# EAGLE board CT_schematic (EAGLE 7.6.0)

Size 100 x 80 mm. Coordinates in mm from the lower left corner, seen from the top.
Outline: 0,0 100,0 100,80 0,80 0,0
Copper layers (1*16): Top 0.035mm / dielectric 1.5mm / Bottom 0.035mm
Design rules "default": minimum track width 10mil, minimum drill 24mil, track to track 8mil, track to pad 8mil, pad to pad 8mil, via to via 8mil, smd to smd 8mil, copper to edge 40mil, drill to drill 8mil, minimum pad ring 10mil, minimum via ring 8mil, stop-mask expansion 4mil, vias tented up to drill 0mil, thermal gap 10mil

## Footprints (pad centres in the part's own frame; a part is rotated, then mirrored left to right if it is on the bottom)
C0603 = smd 0.8 x 0.8: 1 -0.762,0; 2 0.762,0
C0402 = smd 0.5 x 0.5: 1 -0.508,0; 2 0.508,0
C0805 = smd 1.2 x 1.3: 1 -1.016,0; 2 1.016,0
C1210 = smd 1.2 x 2.5: 1 -1.524,0; 2 1.524,0
EXV-9B = smd 2.718 x 1.778: 1 -2.108,0; 2 2.108,0
C1206 = smd 1.3 x 1.6: 1 -1.524,0; 2 1.524,0
R0603 = smd 0.8 x 0.8: 1 -0.762,0; 2 0.762,0
WLCSP64 = smd 0.34 x 0.34: A1 -1.75,1.75; A2 -1.25,1.75; A3 -0.75,1.75; A4 -0.25,1.75; A5 0.25,1.75; A6 0.75,1.75; A7 1.25,1.75; A8 1.75,1.75; B1 -1.75,1.25; B2 -1.25,1.25; B3 -0.75,1.25; B4 -0.25,1.25; B5 0.25,1.25; B6 0.75,1.25; B7 1.25,1.25; B8 1.75,1.25; C1 -1.75,0.75; C2 -1.25,0.75; C3 -0.75,0.75; C4 -0.25,0.75; C5 0.25,0.75; C6 0.75,0.75; C7 1.25,0.75; C8 1.75,0.75; D1 -1.75,0.25; D2 -1.25,0.25; D3 -0.75,0.25; D4 -0.25,0.25; D5 0.25,0.25; D6 0.75,0.25; D7 1.25,0.25; D8 1.75,0.25; E1 -1.75,-0.25; E2 -1.25,-0.25; E3 -0.75,-0.25; E4 -0.25,-0.25; E5 0.25,-0.25; E6 0.75,-0.25; E7 1.25,-0.25; E8 1.75,-0.25; F1 -1.75,-0.75; F2 -1.25,-0.75; F3 -0.75,-0.75; F4 -0.25,-0.75; F5 0.25,-0.75; F6 0.75,-0.75; F7 1.25,-0.75; F8 1.75,-0.75; G1 -1.75,-1.25; G2 -1.25,-1.25; G3 -0.75,-1.25; G4 -0.25,-1.25; G5 0.25,-1.25; G6 0.75,-1.25; G7 1.25,-1.25; G8 1.75,-1.25; H1 -1.75,-1.75; H2 -1.25,-1.75; H3 -0.75,-1.75; H4 -0.25,-1.75; H5 0.25,-1.75; H6 0.75,-1.75; H7 1.25,-1.75; H8 1.75,-1.75
10100565 = smd 0.8 x 2.35: 1 0,0; 2 1.25,0; 3 2.55,0; 4 4.25,0; 5 5.43,0; 6 6.68,0; 7 7.93,0; 8 9.18,0; 9 11.67,0; 10 14.18,0; 11 15.43,0; 12 16.68,0; 13 17.93,0; 14 19.18,0; 15 21.68,0 | smd 1.5 x 3.1: 16 23.495,-1.375; 20 25.685,-22.875 | smd 1.55 x 3.1: 17 -1.815,-1.375; 21 -1.815,-22.875 | drill 1.1 pad 1.1: 18 21.68,-2.375; 19 0.68,-2.375
TST-110-05-T-D-RA = drill 1 pad 1.7 square: 1 0,0 | drill 1 pad 1.7: 2 0,2.54; 3 2.54,0; 4 2.54,2.54; 5 5.08,0; 6 5.08,2.54; 7 7.62,0; 8 7.62,2.54; 9 10.16,0; 10 10.16,2.54; 11 12.7,0; 12 12.7,2.54; 13 15.24,0; 14 15.24,2.54; 15 17.78,0; 16 17.78,2.54; 17 20.32,0; 18 20.32,2.54; 19 22.86,0; 20 22.86,2.54
WNG008 = smd 0.45 x 0.55: 1 -1.27,0; 2 0,0; 3 1.27,0; 4 2.54,0; 5 2.54,7.5; 6 1.27,7.5; 7 0,7.5; 8 -1.27,7.53 | smd 4.9 x 4.75: PAD 0.635,3.75
WFDN-8 = smd 0.48 x 0.7: 1 0,0; 2 1.27,0; 3 2.54,0; 4 3.81,0; 5 3.81,4.45; 6 2.54,4.45; 7 1.27,4.45; 8 0,4.45 | smd 4 x 3: 9 1.89,2.25
FCI_10118193-0001LF = smd 0.4 x 1.35: 1 -1.3,2.675; 2 -0.65,2.675; 3 0,2.675; 4 0.65,2.675; 5 1.3,2.675 | smd 1.6 x 1.4: 6 -3.2,2.45; 7 3.2,2.45 | smd 1.9 x 1.9: 8 -1.2,0; 9 1.2,0 | hole 0.5: -3.3,0; 3.3,0
SOT143B = smd 1 x 0.7: 1 -0.75,-1 | smd 0.6 x 0.7: 2 0.95,-1; 3 0.95,1; 4 -0.95,1
QFN-28 = smd 0.813 x 0.305: 1 -2.451,1.5; 2 -2.451,1; 3 -2.451,0.5; 4 -2.451,0; 5 -2.451,-0.5; 6 -2.451,-1; 7 -2.451,-1.5; 15 2.451,-1.5; 16 2.451,-1; 17 2.451,-0.5; 18 2.451,0; 19 2.451,0.5; 20 2.451,1; 21 2.451,1.5 | smd 0.305 x 0.813: 8 -1.5,-2.451; 9 -1,-2.451; 10 -0.5,-2.451; 11 0,-2.451; 12 0.5,-2.451; 13 1,-2.451; 14 1.5,-2.451; 22 1.5,2.451; 23 1,2.451; 24 0.5,2.451; 25 0,2.451; 26 -0.5,2.451; 27 -1,2.451; 28 -1.5,2.451 | smd 3.607 x 3.607: 29 0,0
SJ-43515TS-SMT-TR = smd 2.2 x 3: 1 0.6,-7.4; 4 3.4,-7.4 | smd 3 x 3: 2 12.8,-7.4; 5 17,-3 | smd 2 x 3: 3 5.3,0; 6 2.5,0 | drill 1.8: P$7 4.5,-3.69; P$8 11.54,-3.69
ABS07-32.768KHZ-7-T = smd 1.1 x 2.4: 1 -2.5,0; 2 0,0
ASFL1 = smd 1.7 x 1.5: 1 -1.27,-1.1; 2 1.27,-1.1; 3 1.27,1.1; 4 -1.27,1.1
LP2954 = smd 1.6 x 0.6: 1 -2.475,1.905 | smd 1.55 x 0.6: 2 -2.475,0.635; 3 -2.475,-0.635; 4 -2.475,-1.905; 5 2.475,-1.905; 6 2.475,-0.635; 7 2.475,0.635; 8 2.475,1.905
SOIC-8_EP = smd 1.6 x 0.533: 1 -2.921,1.905; 2 -2.921,0.635; 3 -2.921,-0.635; 4 -2.921,-1.905; 5 2.921,-1.905; 6 2.921,-0.635; 7 2.921,0.635; 8 2.921,1.905 | smd 2.54 x 3.302: EPAD 0,0 | drill 0.406 pad 0.406: P$1 -0.508,0.635; P$2 0.381,0.635; P$3 -0.508,-0.635; P$4 0.381,-0.635
DFN8_2X3MC = smd 0.813 x 0.305: 1 -1.398,0.75; 2 -1.398,0.25; 3 -1.398,-0.25; 4 -1.398,-0.75; 5 1.398,-0.75; 6 1.398,-0.25; 7 1.398,0.25; 8 1.398,0.75 | smd 1.753 x 1.549: 9 0,0
JST-2-SMD = smd 1 x 4.6: 1 -1,-3.7; 2 1,-3.7 | smd 1.6 x 3.4: NC1 -3.4,1.5; NC2 3.4,1.5
SON-6 = smd 0.55 x 0.3: 1 -0.355,0.5 | smd 0.52 x 0.3: 2 -0.37,0; 3 -0.37,-0.5; 4 0.37,-0.5; 5 0.37,0; 6 0.37,0.5
SW_4-1437565-2 = smd 1.4 x 2.1: 1 -2.23,4.55; 2 -2.23,-4.55; 3 2.23,4.55; 4 2.23,-4.55
LGM67K-G1J2-24-Z = smd 0.8 x 1.4: A -2,0; C 0,0
NC7SZ125M5X = smd 1.3 x 0.7: 1 -1.3,0.95; 2 -1.3,0; 3 -1.3,-0.95; 4 1.3,-0.95; 5 1.3,0.95
DUMMY_PACKAGE_231 = drill 0.3: 1 0,-1; 2 1.5,-1; 3 3,-1

## Placement (x,y rotation side)
C1  1e-06  [C0603]  -22.86,97.79 0 top  (outside the outline)
C2  1e-07  [C0603]  -26.67,97.79 0 top  (outside the outline)
C3  1e-07  [C0603]  -30.48,97.79 0 top  (outside the outline)
C4  1e-07  [C0603]  -34.29,97.79 0 top  (outside the outline)
C5  1e-07  [C0603]  -38.1,97.79 0 top  (outside the outline)
C6  1e-07  [C0603]  -41.91,97.79 0 top  (outside the outline)
C7  4.7e-06  [C0603]  -19.05,97.79 0 top  (outside the outline)
C8  1e-08  [C0603]  -45.72,97.79 0 top  (outside the outline)
C9  1e-06  [C0603]  -49.53,97.79 0 top  (outside the outline)
C10  1e-07  [C0603]  -53.34,97.79 0 top  (outside the outline)
C11  1e-11  [C0402]  -76.2,97.79 0 top  (outside the outline)
C12  1e-11  [C0402]  -80.01,97.79 0 top  (outside the outline)
C13  1e-07  [C0402]  -83.82,97.79 0 top  (outside the outline)
C14  1e-05  [C0805]  -45.72,82.55 0 top  (outside the outline)
C15  1e-07  [C0402]  -87.63,97.79 0 top  (outside the outline)
C16  1e-08  [C0402]  -15.24,102.87 0 top  (outside the outline)
C17  1e-07  [C0402]  -19.05,102.87 0 top  (outside the outline)
C18  2.2e-05  [C1210]  -38.1,74.93 0 top  (outside the outline)
C19  2.2e-05  [C1210]  -44.45,74.93 0 top  (outside the outline)
C20  1e-09  [C0402]  -22.86,102.87 0 top  (outside the outline)
C21  1e-09  [C0402]  -26.67,102.87 0 top  (outside the outline)
C22  1e-07  [C0402]  -30.48,102.87 0 top  (outside the outline)
C23  1e-07  [C0402]  -34.29,102.87 0 top  (outside the outline)
C24  1e-07  [C0402]  -38.1,102.87 0 top  (outside the outline)
C25  1e-07  [C0402]  -41.91,102.87 0 top  (outside the outline)
C26  1e-07  [C0402]  -45.72,102.87 0 top  (outside the outline)
C27  1e-05  [C0805]  -50.8,82.55 0 top  (outside the outline)
C28  1e-05  [C0805]  -55.88,82.55 0 top  (outside the outline)
C29  1e-05  [C0805]  -60.96,82.55 0 top  (outside the outline)
C30  1e-05  [C0805]  -66.04,82.55 0 top  (outside the outline)
C31  1e-05  [C0805]  -71.12,82.55 0 top  (outside the outline)
C32  1e-08  [C0402]  -49.53,102.87 0 top  (outside the outline)
C33  1e-08  [C0402]  -53.34,102.87 0 top  (outside the outline)
C34  1e-06  [EXV-9B]  -16.51,82.55 0 top  (outside the outline)
C35  2.2e-06  [EXV-9B]  -25.4,82.55 0 top  (outside the outline)
C36  1e-05  [C1210]  -50.8,74.93 0 top  (outside the outline)
C37  1e-05  [C1210]  -57.15,74.93 0 top  (outside the outline)
C38  1e-05  [C1210]  -63.5,74.93 0 top  (outside the outline)
C39  1e-05  [C1210]  -69.85,74.93 0 top  (outside the outline)
C40  1e-07  [C0402]  -57.15,102.87 0 top  (outside the outline)
C41  1e-05  [C1206]  -76.2,74.93 0 top  (outside the outline)
C42  1e-05  [C1206]  -82.55,74.93 0 top  (outside the outline)
C43  1e-08  [C0402]  -60.96,102.87 0 top  (outside the outline)
C44  1e-08  [C0402]  -64.77,102.87 0 top  (outside the outline)
R2  1000.0  [R0603]  -57.15,97.79 0 top  (outside the outline)
R4  4700.0  [R0603]  -60.96,97.79 0 top  (outside the outline)
R5  10000.0  [R0603]  -30.48,92.71 0 top  (outside the outline)
R6  100000.0  [R0603]  -85.09,82.55 0 top  (outside the outline)
R7  100000.0  [R0603]  -15.24,87.63 0 top  (outside the outline)
R8  100000.0  [R0603]  -20.32,87.63 0 top  (outside the outline)
R9  100000.0  [R0603]  -25.4,87.63 0 top  (outside the outline)
R10  100000.0  [R0603]  -30.48,87.63 0 top  (outside the outline)
R11  100000.0  [R0603]  -35.56,87.63 0 top  (outside the outline)
R12  100000.0  [R0603]  -40.64,87.63 0 top  (outside the outline)
R13  100000.0  [R0603]  -45.72,87.63 0 top  (outside the outline)
R14  100000.0  [R0603]  -50.8,87.63 0 top  (outside the outline)
R15  100000.0  [R0603]  -55.88,87.63 0 top  (outside the outline)
R16  100000.0  [R0603]  -60.96,87.63 0 top  (outside the outline)
R17  10000.0  [R0603]  -35.56,92.71 0 top  (outside the outline)
R18  10000.0  [R0603]  -40.64,92.71 0 top  (outside the outline)
R19  10000.0  [R0603]  -45.72,92.71 0 top  (outside the outline)
R20  10000.0  [R0603]  -50.8,92.71 0 top  (outside the outline)
R21  100000.0  [R0603]  -66.04,87.63 0 top  (outside the outline)
R22  100000.0  [R0603]  -71.12,87.63 0 top  (outside the outline)
R23  100000.0  [R0603]  -76.2,87.63 0 top  (outside the outline)
R24  47000.0  [R0603]  -55.88,92.71 0 top  (outside the outline)
R25  47000.0  [R0603]  -60.96,92.71 0 top  (outside the outline)
R26  47000.0  [R0603]  -66.04,92.71 0 top  (outside the outline)
R27  680.0  [R0603]  -64.77,97.79 0 top  (outside the outline)
R28  100000.0  [R0603]  -81.28,87.63 0 top  (outside the outline)
R29  100000.0  [R0603]  -86.36,87.63 0 top  (outside the outline)
R30  47000.0  [R0603]  -71.12,92.71 0 top  (outside the outline)
R31  100000.0  [R0603]  -15.24,92.71 0 top  (outside the outline)
R32  4031.5447154472  [R0603]  -80.01,82.55 0 top  (outside the outline)
R33  2200.0  [R0603]  -68.58,97.79 0 top  (outside the outline)
R34  10000.0  [R0603]  -76.2,92.71 0 top  (outside the outline)
R35  10000.0  [R0603]  -81.28,92.71 0 top  (outside the outline)
R36  82000.0  [R0603]  -86.36,92.71 0 top  (outside the outline)
R37  300000.0  [R0603]  -20.32,92.71 0 top  (outside the outline)
R38  120000.0  [R0603]  -25.4,92.71 0 top  (outside the outline)
R39  2000.0  [R0603]  -72.39,97.79 0 top  (outside the outline)
R40  10000.0  [R0603]  -15.24,97.79 0 top  (outside the outline)
U1  STM32L433RCY6  [WLCSP64]  -41.91,59.69 0 top  (outside the outline)
U2  10100565  [10100565]  -40.64,25.4 0 top  (outside the outline)
U3  TST-110-05-T-D-RA  [TST-110-05-T-D-RA]  -46.99,66.04 0 top  (outside the outline)
U4  S25FL128SDPNFI001  [WNG008]  -76.2,33.02 0 top  (outside the outline)
U5  SST26WF016B-104I/MF  [WFDN-8]  -46.99,46.99 0 top  (outside the outline)
U6  10118193-0001LF  [FCI_10118193-0001LF]  -50.8,58.42 0 top  (outside the outline)
U7  prtr5v0u2ax  [SOT143B]  -77.47,102.87 0 top  (outside the outline)
U8  WM8731CLSEFL  [QFN-28]  -30.48,76.2 0 top  (outside the outline)
U9  SJ-43515TS-SMT-TR  [SJ-43515TS-SMT-TR]  -69.85,10.16 0 top  (outside the outline)
U10  SJ-43515TS-SMT-TR  [SJ-43515TS-SMT-TR]  -39.37,39.37 0 top  (outside the outline)
U11  ABS07-32.768KHZ-7-T  [ABS07-32.768KHZ-7-T]  -64.77,68.58 0 top  (outside the outline)
U12  ASFL1-12.288MHZ-EC-T  [ASFL1]  -82.55,49.53 0 top  (outside the outline)
U13  ASFL1-25MHZ-NCS  [ASFL1]  -26.67,59.69 0 top  (outside the outline)
U14  LP2954AIMX/NOPB  [LP2954]  -60.96,49.53 0 top  (outside the outline)
U15  MIC5234YME  [SOIC-8_EP]  -73.66,67.31 0 top  (outside the outline)
U16  MCP73831T-2ACI/MC  [DFN8_2X3MC]  -15.24,106.68 0 top  (outside the outline)
U17  S2B-PH-SM4-TB(LF)(SN)  [JST-2-SMD]  -22.86,50.8 0 top  (outside the outline)
U18  TPS3895ADRYR  [SON-6]  -86.36,101.6 0 top  (outside the outline)
U19  4-1437565-2  [SW_4-1437565-2]  -55.88,35.56 0 top  (outside the outline)
U20  Q65110A2395  [LGM67K-G1J2-24-Z]  -17.78,76.2 0 top  (outside the outline)
U21  nc7sz125m5x  [NC7SZ125M5X]  -33.02,81.28 0 top  (outside the outline)
U22  nc7sz125m5x  [NC7SZ125M5X]  -39.37,81.28 0 top  (outside the outline)
U23  Dummy  [DUMMY_PACKAGE_231]  -83.82,102.87 0 top  (outside the outline)

## Library data of the parts
C1-C44 R2 R4-R40 U1-U23 = circuit_tree

## Nets
CLK_CRYSTAL_U1_C7: C11.1 U1.C7 U11.1
CLK_CRYSTAL_U1_C8: C12.1 U1.C8 U11.2
CLK_U1_D8: U1.D8 U13.3
CLK_U8_1: U8.1 U12.3
GND: C1.2 C2.2 C3.2 C4.2 C5.2 C6.2 C7.2 C8.2 C9.2 C10.2 C11.2 C12.2 C13.2 C14.2 C15.2 C16.2 C17.2 C21.2 C22.2 C23.2 C24.2 C25.2 C26.2 C27.2 C28.2 C29.2 C30.2 C31.2 C32.2 C33.2 C34.2 C35.2 C36.2 C37.2 C38.2 C39.2 C40.2 C41.2 C42.2 C43.2 C44.2 R2.2 R5.2 R24.2 R25.2 R26.2 R31.2 R33.2 R36.2 R38.2 R39.2 U1.A7 U1.B1 U1.F8 U1.H2 U1.H8 U2.6 U2.10 U2.12 U2.16 U2.17 U2.20 U2.21 U3.4 U3.6 U3.8 U3.10 U3.12 U3.14 U3.16 U3.18 U3.20 U4.4 U4.PAD U5.4 U5.9 U6.5 U6.6 U6.7 U6.8 U6.9 U7.1 U8.4 U8.15 U8.19 U8.25 U8.26 U8.29 U9.1 U10.1 U12.2 U13.2 U14.4 U15.7 U15.EPAD U16.6 U16.9 U17.2 U18.2 U20.C U21.2 U21.3 U22.1 U22.3 U23.1
INPUT_USBPOWER_5V: C41.1 R40.2 U6.1 U7.4 U16.1 U16.2
NET_U1_C5: R5.1 U1.C5
NET_U1_D6: R4.1 U1.D6 U22.4
NET_U1_H3: U20.A
NET_U1_H4: U19.3 U19.4
NET_U2_1: R8.1 U2.1
NET_U2_2: R7.1 U2.2
NET_U2_18: U2.18 U2.19
NET_U4_3: R18.1 U4.3
NET_U4_7: R20.1 U4.7
NET_U8_9: U8.9
NET_U8_20: C26.1 C31.1 U8.20
NET_U9_2: C19.1 R25.1 U9.2
NET_U9_5: C18.1 R24.1 U9.5
NET_U9_13: C18.2
NET_U9_14: C19.2
NET_U10_5: C20.1 C21.1 R26.1 R27.1 U10.5
NET_U10_21: R27.2
NET_U10_22: C20.2
NET_U14_3: R29.1 U14.3
NET_U14_5: R28.1 U14.5
NET_U14_7: R30.2 R31.1 U14.7
NET_U15_4: R32.2 R33.1 U15.4
NET_U16_5: R40.1 U16.5
NET_U16_8: R39.1 U16.8
NET_U18_1: R35.1 R36.1 U18.1
NET_U18_3: R37.2 R38.1 U18.3
NET_U18_4: R34.1 U18.4 U21.4 U22.2
NET_U19_1: R2.1 U19.1 U19.2
PROC_PB7: U1.A6 U23.3
PROC_PD2: U1.A4 U23.2
PROC_QUADSPI_BK1_IO0: U1.H5 U5.5
PROC_QUADSPI_BK1_IO1: U1.F4 U5.2
PROC_QUADSPI_BK1_IO2: R22.1 U1.H6 U5.3
PROC_QUADSPI_BK1_IO3: R23.1 U1.G5 U5.7
PROC_QUADSPI_BK1_NCS: R21.1 U1.F6 U5.1
PROC_QUADSPI_CLK: U1.G6 U5.6
PROC_SAI1_FS_A: U1.D1 U8.9 U8.11
PROC_SAI1_SCK_A: U1.E3 U8.7
PROC_SAI1_SD_A: U1.D2 U8.8
PROC_SDMMC1_CK: R6.1 U1.A3 U2.8
PROC_SDMMC1_D0: R9.1 U1.F3 U2.4
PROC_SDMMC1_D1: R10.1 U1.E2 U2.3
PROC_SDMMC1_D2: R11.1 U1.C3 U2.15
PROC_SDMMC1_D3: R12.1 U1.B3 U2.14
PROC_SDMMC1_D4: R13.1 U1.C6 U2.13
PROC_SDMMC1_D5: R14.1 U1.B6 U2.11
PROC_SDMMC1_D6: R15.1 U1.F1 U2.7
PROC_SDMMC1_D7: R16.1 U1.E1 U2.5
PROC_SPI1_MISO: U1.B4 U4.2
PROC_SPI1_MOSI: U1.C4 U4.5
PROC_SPI1_NSS: R19.1 U1.A2 U4.1
PROC_SPI1_SCK: U1.F5 U4.6
PROC_SYS_JTCK_SWCLK: U1.B2 U3.9
PROC_SYS_JTDO_SWO: U1.A5 U3.13
PROC_SYS_JTMS_SWDIO: U1.C2 U3.7
PROC_USB_DM: U1.D3 U6.2 U7.3
PROC_USB_DP: U1.C1 U6.3 U7.2
RST_OUT_U3_SRESET_B: R17.1 U3.15 U21.1
VCC_S1_3V7: C34.1 C36.1 C37.1 C42.1 R29.2 U14.8 U15.5 U15.8 U16.3 U16.4 U17.1
VCC_TIER1_1V8: C1.1 C2.1 C3.1 C4.1 C5.1 C6.1 C7.1 C8.1 C9.1 C13.1 C14.1 C15.1 C16.1 C17.1 C22.1 C23.1 C24.1 C25.1 C27.1 C28.1 C29.1 C30.1 C35.1 C40.1 C43.1 C44.1 R4.2 R6.2 R7.2 R8.2 R9.2 R10.2 R11.2 R12.2 R13.2 R14.2 R15.2 R16.2 R17.2 R18.2 R19.2 R20.2 R21.2 R22.2 R23.2 R28.2 R30.1 R34.2 R35.2 R37.1 U1.A8 U1.B7 U1.G8 U1.H1 U1.H7 U2.9 U3.1 U4.8 U5.8 U8.3 U8.5 U8.12 U8.18 U14.1 U18.6 U21.5 U22.5
VCC_TIER1_3V3: C10.1 C32.1 C33.1 C38.1 C39.1 R32.1 U1.A1 U12.4 U13.4 U15.1

## Tracks (layer width: path | path; a pad name or v marks a point on that pad's centre or on a via)
CLK_CRYSTAL_U1_C7  (2 unrouted)
CLK_CRYSTAL_U1_C8  (2 unrouted)
CLK_U1_D8  (1 unrouted)
CLK_U8_1  (1 unrouted)
GND  (104 unrouted)
INPUT_USBPOWER_5V  (5 unrouted)
NET_U1_C5  (1 unrouted)
NET_U1_D6  (2 unrouted)
NET_U1_H4  (1 unrouted)
NET_U2_1  (1 unrouted)
NET_U2_2  (1 unrouted)
NET_U2_18  (1 unrouted)
NET_U4_3  (1 unrouted)
NET_U4_7  (1 unrouted)
NET_U8_20  (2 unrouted)
NET_U9_2  (2 unrouted)
NET_U9_5  (2 unrouted)
NET_U10_5  (4 unrouted)
NET_U14_3  (1 unrouted)
NET_U14_5  (1 unrouted)
NET_U14_7  (2 unrouted)
NET_U15_4  (2 unrouted)
NET_U16_5  (1 unrouted)
NET_U16_8  (1 unrouted)
NET_U18_1  (2 unrouted)
NET_U18_3  (2 unrouted)
NET_U18_4  (3 unrouted)
NET_U19_1  (2 unrouted)
PROC_PB7  (1 unrouted)
PROC_PD2  (1 unrouted)
PROC_QUADSPI_BK1_IO0  (1 unrouted)
PROC_QUADSPI_BK1_IO1  (1 unrouted)
PROC_QUADSPI_BK1_IO2  (2 unrouted)
PROC_QUADSPI_BK1_IO3  (2 unrouted)
PROC_QUADSPI_BK1_NCS  (2 unrouted)
PROC_QUADSPI_CLK  (1 unrouted)
PROC_SAI1_FS_A  (2 unrouted)
PROC_SAI1_SCK_A  (1 unrouted)
PROC_SAI1_SD_A  (1 unrouted)
PROC_SDMMC1_CK  (2 unrouted)
PROC_SDMMC1_D0  (2 unrouted)
PROC_SDMMC1_D1  (2 unrouted)
PROC_SDMMC1_D2  (2 unrouted)
PROC_SDMMC1_D3  (2 unrouted)
PROC_SDMMC1_D4  (2 unrouted)
PROC_SDMMC1_D5  (2 unrouted)
PROC_SDMMC1_D6  (2 unrouted)
PROC_SDMMC1_D7  (2 unrouted)
PROC_SPI1_MISO  (1 unrouted)
PROC_SPI1_MOSI  (1 unrouted)
PROC_SPI1_NSS  (2 unrouted)
PROC_SPI1_SCK  (1 unrouted)
PROC_SYS_JTCK_SWCLK  (1 unrouted)
PROC_SYS_JTDO_SWO  (1 unrouted)
PROC_SYS_JTMS_SWDIO  (1 unrouted)
PROC_USB_DM  (2 unrouted)
PROC_USB_DP  (2 unrouted)
RST_OUT_U3_SRESET_B  (2 unrouted)
VCC_S1_3V7  (10 unrouted)
VCC_TIER1_1V8  (66 unrouted)
VCC_TIER1_3V3  (9 unrouted)